# Altium PCB HC05.PcbDoc
Units mil, origin at the board's own origin, x right, y up, seen from the top; angles counter-clockwise.
Board outline 1165 x 1544 mil, 2 copper layers (Top Layer, Bottom Layer); 7 components, 0 nets, 74 pads, 0 vias.
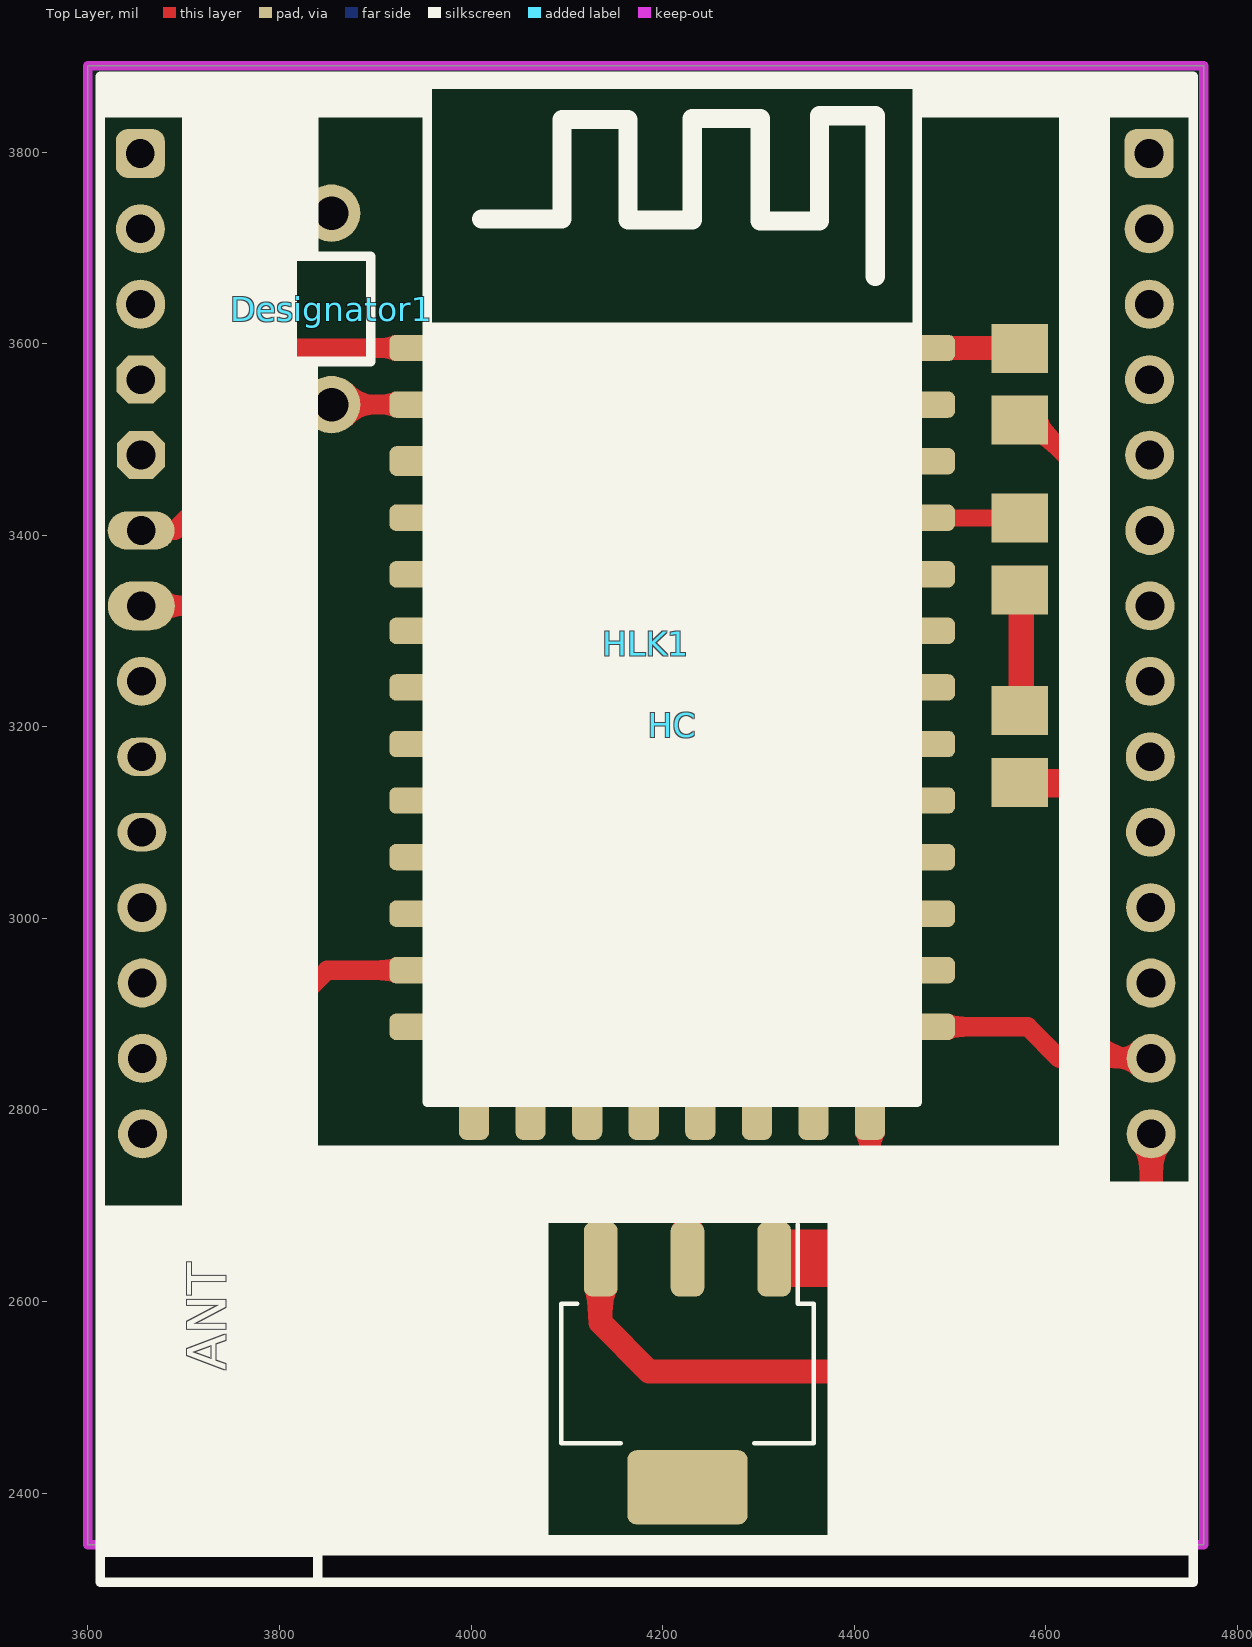
[diagram p0: Top Layer view]
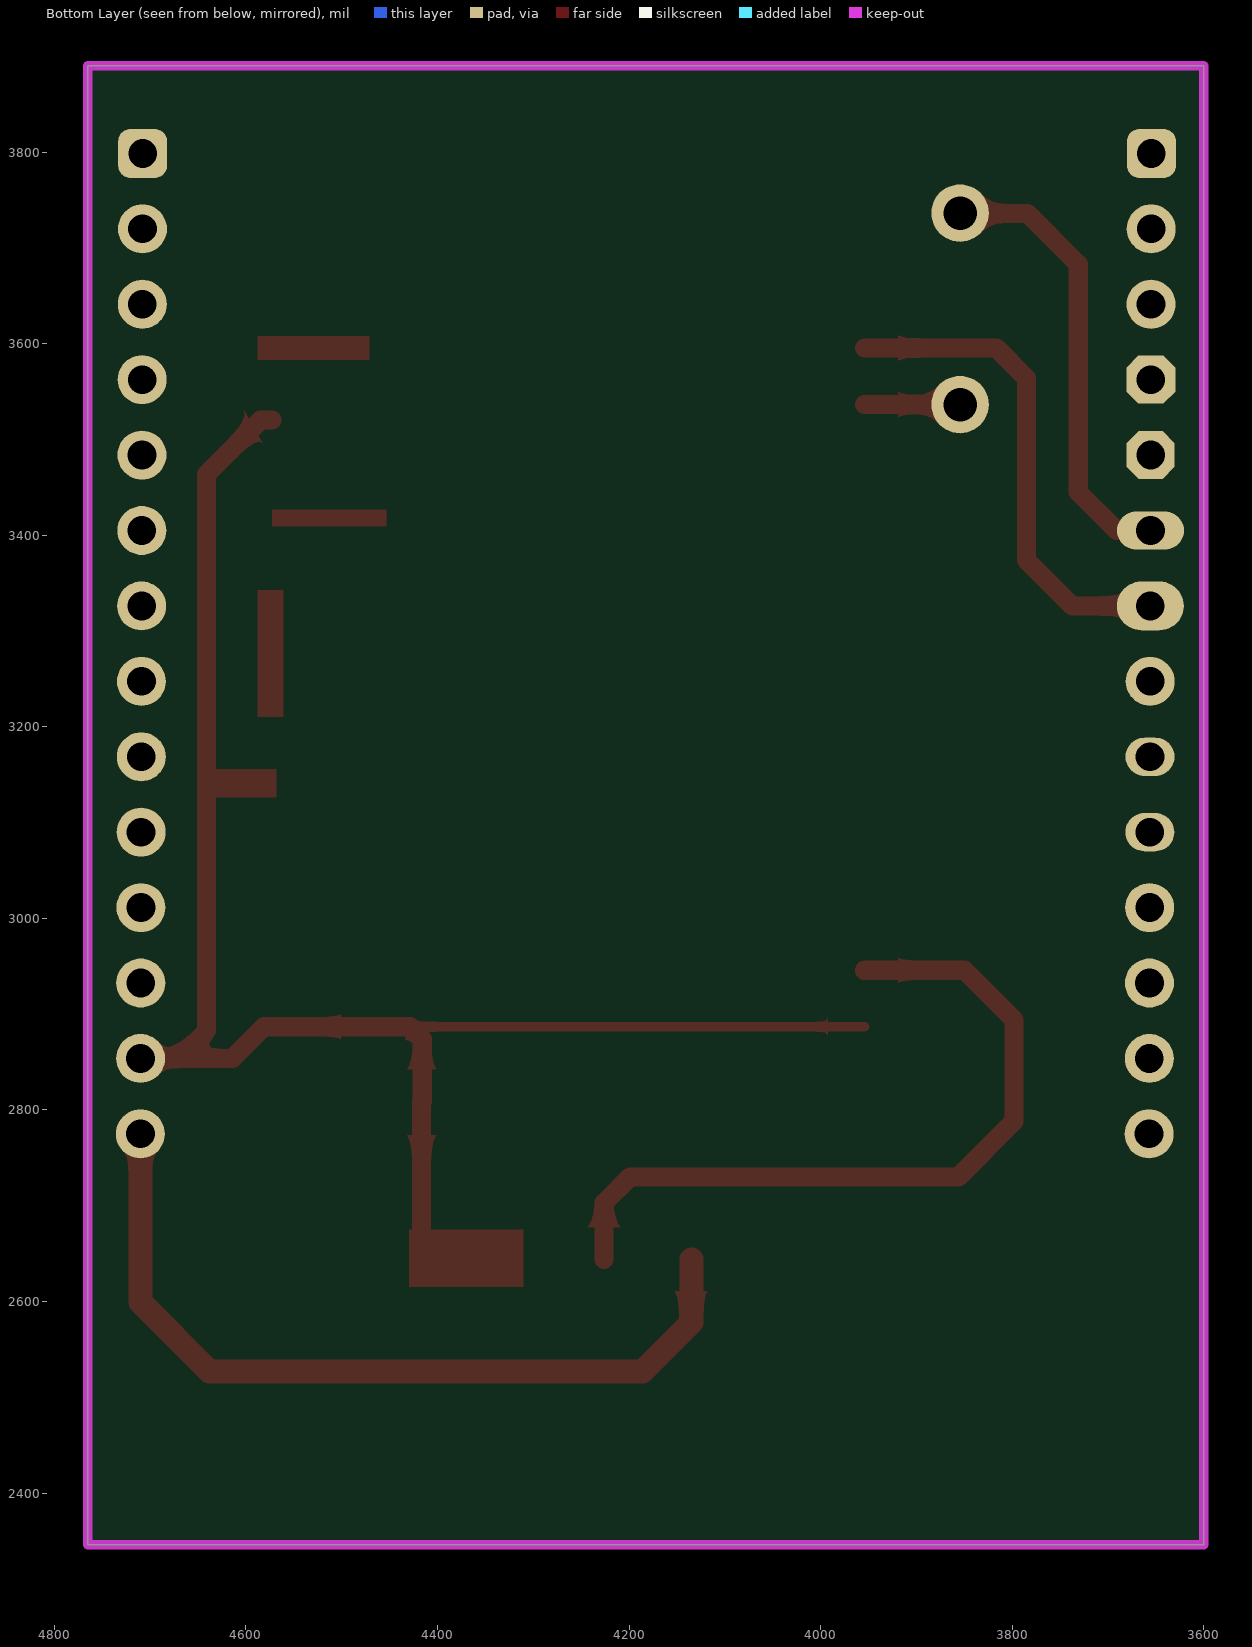
[diagram p1: Bottom Layer view, seen from below]

## Layer stack, top to bottom
Top Solder: solder mask 0.4, Solder Resist, Dk 3.5
Top Layer: signal copper 1.4
Dielectric 1: dielectric 12.6, FR-4, Dk 4.8
Bottom Layer: signal copper 1.4
Bottom Solder: solder mask 0.4, Solder Resist, Dk 3.5

## Board outline
3600,2346 4765,2346 4765,3890 3600,3890

## Design rules (kind name [scope] priority, off if disabled: settings)
Clearance [All] p1: gap=10
PolygonConnect [All] p1: connectstyle=Relief reliefconductorwidth=10 reliefentries=4 polygonreliefangle="90 Angle" airgapwidth=10
RoutingVias [All] p1: holewidth=28 width=50 viastyle="Through Hole" minholewidth=28 minwidth=50 maxholewidth=28 maxwidth=50
SolderMaskExpansion [All] p1: expansion=4
Width [All] p1: maxlimit=10 minlimit=10 preferedwidth=10
30 further rules are at their usual default settings.

## Components (designator, comment, footprint, x,y, rotation, side; value= is the part's Value field where it differs from the comment)
Designator1 "Comment" Res_tiny 3854.38,3536.38 r90 top
HC "HC05_Bluetooth" HC05_Bluetooth 4222,3177 r0 top
HLK1 "HLK_WifiModule" HLK 4709,3800 r180 top (schematic designator HLK)
PJ "PJ1117_3.3V" PJ1117s 4226,2526 r180 top
R1 "Res 0805" R0805 4573,3215 r270 top
R1 "Res 0805" R0805 4573,3416 r270 top
R1 "Res 0805" R0805 4573,3522 r90 top

## Footprints (in the part's own frame and the unit in brackets; to place one, negate y for a bottom-side part, rotate by r counter-clockwise, add the part's x,y. Pads: shape width x height; smd on the part's side, far side on the other; paste and mask are expansions set on the pad)
HC05_Bluetooth [mm]
  rrect50% 2x0.7 smd: 1(-6.804,10.628) 2(-6.804,9.128) 4(-6.804,6.128) 5(-6.804,4.628) 6(-6.804,3.128) 7(-6.804,1.628) 8(-6.804,0.128) 9(-6.804,-1.372) 10(-6.804,-2.872) 11(-6.804,-4.372) 12(-6.804,-5.872) 13(-6.804,-7.372) 22(6.196,-7.372) 23(6.196,-5.872) 24(6.196,-4.372) 25(6.196,-2.872) 26(6.196,-1.372) 27(6.196,0.128) 28(6.196,1.628) 29(6.196,3.128) 30(6.196,4.628) 31(6.196,6.128) 32(6.196,7.628) 33(6.196,9.128) 34(6.196,10.628)
  rrect50% 2x0.8 smd: 3(-6.804,7.628)
  rrect50% 0.8x2 smd: 14(-5.558,-9.372) 15(-4.058,-9.372) 16(-2.558,-9.372) 17(-1.058,-9.372) 18(0.442,-9.372) 19(1.942,-9.372) 20(3.442,-9.372) 21(4.942,-9.372)
  silkscreen extent -6.8,-9.37 6.2,17.63, body extent -6.81,-9.14 6.2,17.76, height 2.5
HLK [mm]
  round 1.3 hole 0.762: 1(-0.03,26.035) 2(-0.025,24.035) 3(-0.021,22.035) 4(-0.016,20.035) 5(-0.012,18.035) 6(-0.007,16.035) 7(-0.002,14.035) 8(0.002,12.035) 9(0.007,10.035) 10(0.011,8.035) 11(0.016,6.035) 12(0.021,4.035) 13(0.025,2.035) 16(26.775,2.035) 17(26.771,4.035) 22(26.748,14.035) 25(26.734,20.035) 26(26.729,22.035) 27(26.725,24.035) 28(26.72,26.035)
  rrect50% 1.3x1.3 hole 0.762: 14(0.03,0.035) 15(26.78,0.035)
  oct 1.3x1.27 hole 0.762: 18(26.766,6.035)
  oct 1.27x1.27 hole 0.762: 19(26.761,8.035)
  oval 1.778x1.016 hole 0.762: 20(26.757,10.035)
  oval 1.778x1.3 hole 0.762: 21(26.752,12.035)
  oval 1.3x1.016 hole 0.762: 23(26.743,16.035) 24(26.738,18.035)
  silkscreen extent -1.14,-2.01 27.84,37.92, body extent -1.17,-1.99 27.83,38.01, height 5.25
PJ1117s [mm]
  rrect49% 0.89x1.97 smd: 1(-2.3,-3) 2(0,-3) 3(2.3,-3)
  rrect25% 3.19x1.97 smd: 4(0,3.05)
  silkscreen extent -3.35,-4.4 3.35,1.88, body extent -3.25,-3.47 3.25,3.53, height 1.8
R0805 [mm]
  rect 1.3x1.5 smd: 1(-0.046,0) 2(1.854,0)
  body extent -0.1,-0.62 1.9,0.63, height 0.78
Res_tiny [mil]
  round 60 hole 35: 1(0,0) 2(200,0)
  silkscreen extent 45,-41 155,41, body extent 32,-31 170,29, height 60

## Nets (pads, with @x,y where several pads share a name; then routed paths per layer and width w, separated by ;. In a path a pad name is that pad's centre, name@x,y a point inside that pad or via, vN(x,y) a via of type N, cw(c..) or ccw(c..) an arc to the next point about the centre after c; other vN are vias at no path point)
pads on no net: Designator1.1 Designator1.2 HC.1 HC.2 HC.3 HC.4 HC.5 HC.6 HC.7 HC.8 HC.9 HC.10 HC.11 HC.12 HC.13 HC.14 HC.15 HC.16 HC.17 HC.18 HC.19 HC.20 HC.21 HC.22 HC.23 HC.24 HC.25 HC.26 HC.27 HC.28 HC.29 HC.30 HC.31 HC.32 HC.33 HC.34 HLK1.1 HLK1.2 HLK1.3 HLK1.4 HLK1.5 HLK1.6 HLK1.7 HLK1.8 HLK1.9 HLK1.10 HLK1.11 HLK1.12 HLK1.13 HLK1.14 HLK1.15 HLK1.16 HLK1.17 HLK1.18 HLK1.19 HLK1.20 HLK1.21 HLK1.22 HLK1.23 HLK1.24 HLK1.25 HLK1.26 HLK1.27 HLK1.28 PJ.1 PJ.2 PJ.3 PJ.4 R1.1 R1.2
copper on no net: | length 4538.6
  Top Layer w10: 3954.12,2886.78 4465.94,2886.78
  Top Layer w20: 3655.58,3404.92 3690.92,3404.92 3731,3445 3731,3683 3784,3736 3854.38,3736 ; 3655.76,3326.18 3737.18,3326.18 3785.22,3374.22 3785.22,3564.22 3816.44,3595.44 3954.12,3595.44 ; 3854.38,3536.38 3954.12,3536.38 ; 3954.12,2945.83 3849.83,2945.83 3798,2894 3798,2788 3856,2730 4199,2730 4226,2703 4226,2644.09 ; 4416.56,2644.11 4416.56,2808.04 4416,2808.6 4416,2874 4428.78,2886.78 4465.94,2886.78 4581.22,2886.78 4614.26,2853.74 4710,2853.74 ; 4573,3520.2 4584.8,3520.2 4641,3464 4641,2882.74 4670,2853.74
  Top Layer w25: 4135,2644.09 4135,2578 4186,2527 4638,2527 4710.18,2599.18 4710.18,2775

## Keep-outs
Keep-Out Layer:
  lines w10: 3600,2346 4765,2346 4765,3685 4765,3890 3600,3890 3600,2346

## Other copper
Top Layer:
  rectangle: 4568,3126 4641,3156
  rectangle: 4561,3210 4588,3343
  rectangle: 4453,3409 4573,3427
  rectangle: 4310,2615 4430,2675
  rectangle: 4471,3583 4588,3608
Bottom Layer:
  text "To return HC-05 to mfg. default settings: \"AT+ORGL\" / To get version of your HC-05 enter: \"AT+VERSION?\" / To change device name from the default HC-05 to let's say MYBLUE enter: \"AT+NAME=MYBLUE\" / To change default security code from 1234 to 2987 enter: \"AT+PSWD=2987\" / To change HC-05 baud rate from default 9600 to 115200, 1 stop bit, 0 parity enter: \"AT+UART=115200,1,0\"" at 2129,4234 h60

## Silkscreen, mask and mechanical layers (free items; w line width, h text height)
Top Overlay:
  rectangle: 3954.12,2808.04 4464,3622
  rectangle: 3613,2333 3840,2695
  rectangle: 4614,2335 4667,3879
  rectangle: 3698,2657 3751,3879
  rectangle: 4647,2335 4754,2725
  rectangle: 3725,2695 3840,3582
  rectangle: 3720,3570 3814,3695
  rectangle: 3720,3695 3813,3879
  rectangle: 3799,3691.38 3841,3879
  rectangle: 3613,3836 3954,3879
  rectangle: 4464,3836 4750,3879
  rectangle: 3840,2335 4081,2694
  rectangle: 4015,2335 4697,2356
  rectangle: 4372,2338 4666,2694
  rectangle: 3801,2682 4643,2763

## Text inside footprints (layer, text, board x,y; h text height)
HLK1: Top Overlay "ANT" at 3744,2528 h40 r90